# EAGLE board SGWB circuit test board rev1 (EAGLE 9.5.0)
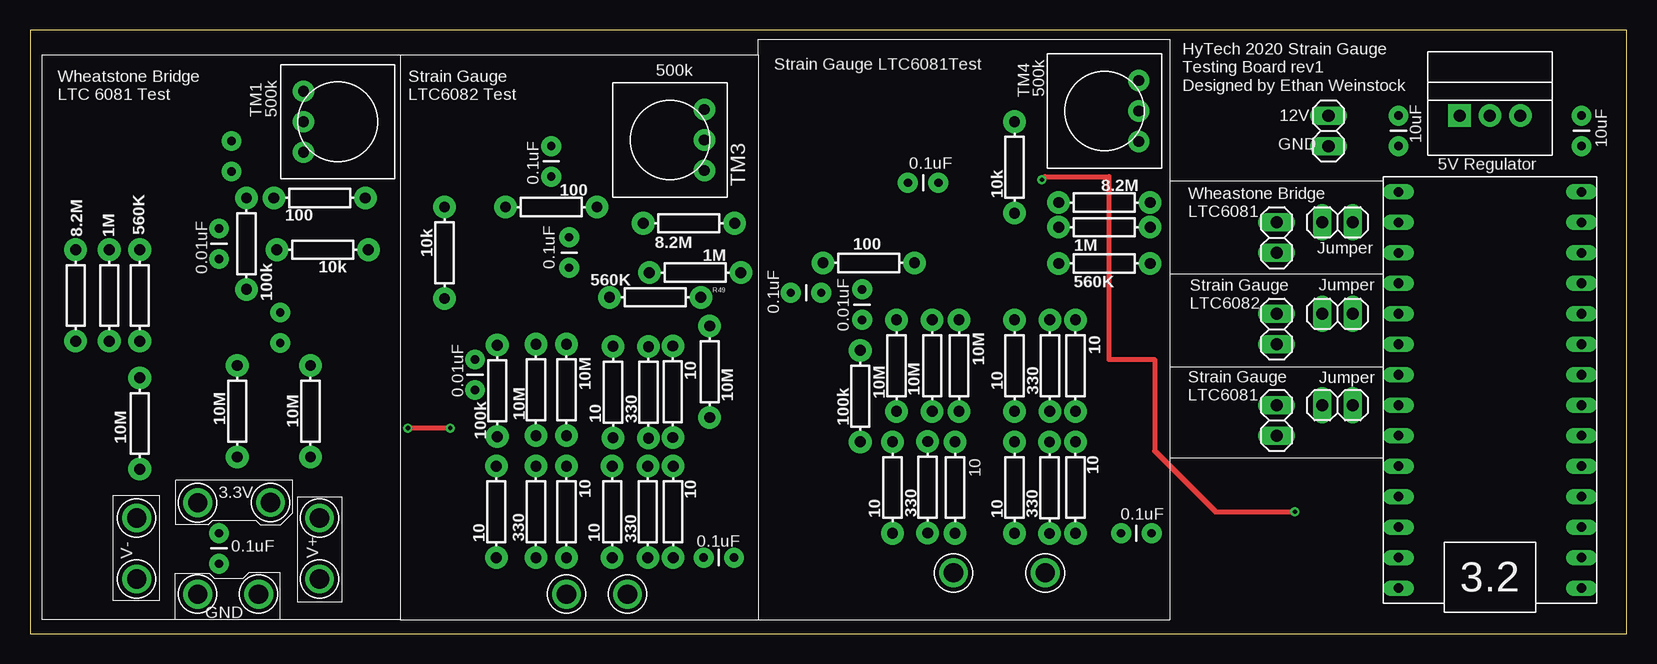
[diagram p0: board, top side]
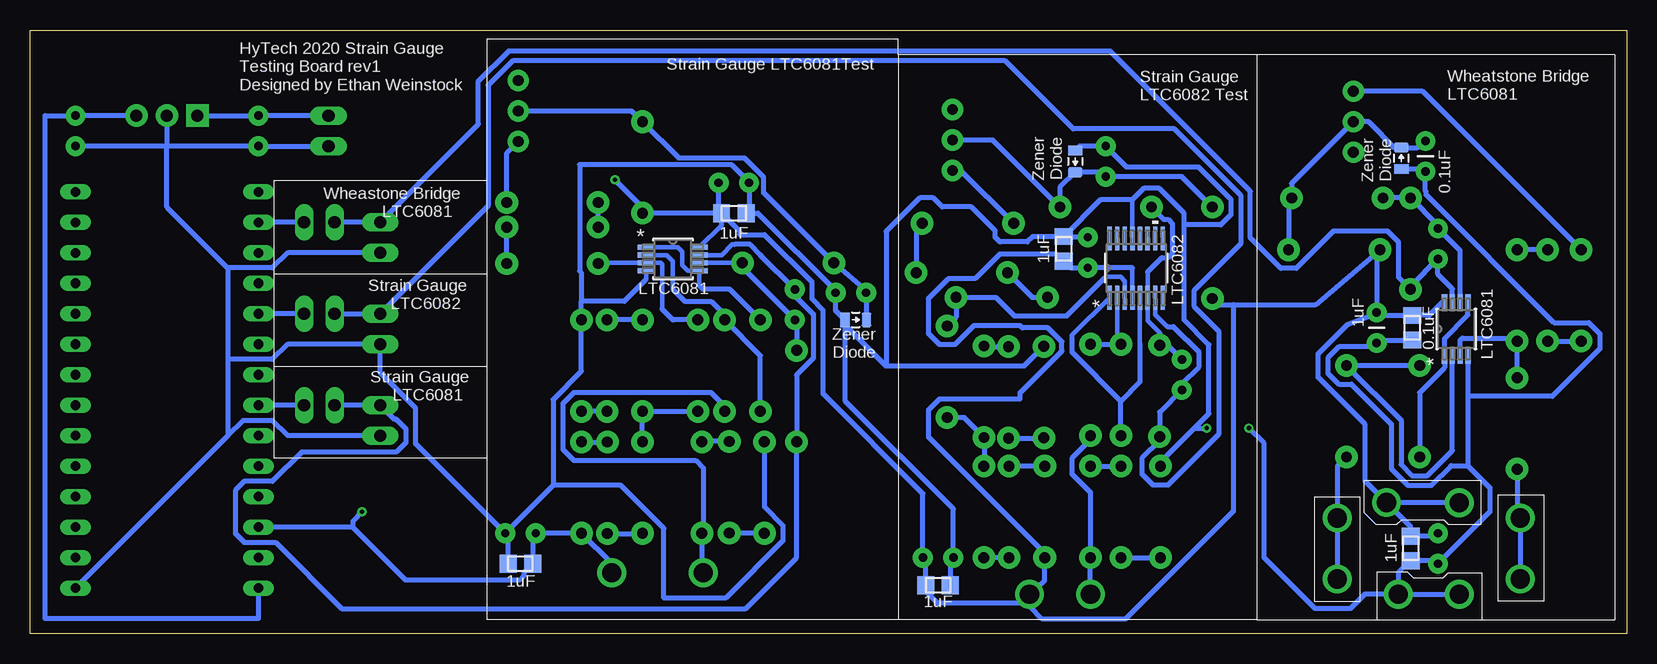
[diagram p1: board, bottom side, seen from below]

Size 133.08 x 50.32 mm. Coordinates in mm from the lower left corner, seen from the top.
Outline: 0,0 133.08,0 133.08,50.32 0,50.32 0,0
Copper layers (1*16): Top 0.035mm / dielectric 1.5mm / Bottom 0.035mm
Design rules "DRC Advanced Circuits": minimum track width 6mil, minimum drill 10mil, track to track 6mil, track to pad 6mil, pad to pad 6mil, via to via 6mil, smd to smd 6mil, copper to edge 40mil, drill to drill 6mil, minimum pad ring 10mil, minimum via ring 8mil, stop-mask expansion 4mil, vias tented up to drill 0mil, thermal gap 10mil

## Footprints (pad centres in the part's own frame; a part is rotated, then mirrored left to right if it is on the bottom)
0805 = smd 1.4 x 1.5: 1 -1.025,0; 2 1.025,0
CAP-PTH-SMALL = drill 0.7 pad 1.651: 1 0,0; 2 2.54,0
1X02 = drill 1.016 long: 1 -1.27,0; 2 1.27,0
0805_D = smd 0.8 x 1.2: A -0.9,0; C 0.9,0
AXIAL-0.3 = drill 0.9 pad 1.88: P$1 -3.81,0; P$2 3.81,0
OKI-78SR = drill 1 pad 1.88 square: 1 -2.54,0 | drill 1 pad 1.88: 2 0,0; 3 2.54,0
TRIM-3386 = drill 0.9 pad 1.778: 1 -2.54,-2.857; 2 0,-2.857; 3 2.54,-2.857
SSOP-16_GN = smd 1.981 x 0.356: 1 -2.464,2.223; 2 -2.464,1.587; 3 -2.464,0.953; 4 -2.464,0.318; 5 -2.464,-0.318; 6 -2.464,-0.953; 7 -2.464,-1.587; 8 -2.464,-2.223; 9 2.464,-2.223; 10 2.464,-1.587; 11 2.464,-0.953; 12 2.464,-0.318; 13 2.464,0.318; 14 2.464,0.953; 15 2.464,1.587; 16 2.464,2.223
MSOP-8_MS = smd 1.397 x 0.432: 1 -2.21,0.975; 2 -2.21,0.325; 3 -2.21,-0.325; 4 -2.21,-0.975; 5 2.21,-0.975; 6 2.21,-0.325; 7 2.21,0.325; 8 2.21,0.975
TEENSY_3.2_SIMPLE = drill 0.8 long: 3.3V 16.51,29.21; A0 16.51,3.81; A1 16.51,6.35; A2 16.51,8.89; A3 16.51,11.43; A4 16.51,13.97; A5 16.51,16.51; A6 16.51,19.05; A7 16.51,21.59; A8 16.51,24.13; A9 16.51,26.67; AGND 16.51,31.75; D0(RX1) 1.27,31.75; D1(TX1) 1.27,29.21; D2 1.27,26.67; D3(CANTX) 1.27,24.13; D4(CANRX) 1.27,21.59; D5 1.27,19.05; D6 1.27,16.51; D7(RX3) 1.27,13.97; D8(TX3) 1.27,11.43; D9(RX2) 1.27,8.89; D10(TX2) 1.27,6.35; D11 1.27,3.81; D12 1.27,1.27; D13 16.51,1.27; GND 1.27,34.29; VIN 16.51,34.29
TEST_POINT = drill 1.6: P$1 0,0

## Placement (x,y rotation side)
C1  0.1uF  [0805]  17.91,25.5 90 bottom
C2  0.01uF  [CAP-PTH-SMALL]  15.75,33.78 270 top
C3  0.1uF  [CAP-PTH-SMALL]  16.79,38.53 90 bottom
C4  1uF  [CAP-PTH-SMALL]  20.85,26.77 270 bottom
C5  10uF  [CAP-PTH-SMALL]  114.05,40.64 90 top
C6  10uF  [CAP-PTH-SMALL]  129.29,40.64 90 top
C11  0.1uF  [CAP-PTH-SMALL]  58.67,6.35 180 top
C12  1uF  [0805]  57.4,4.06 0 bottom
C14  0.01uF  [CAP-PTH-SMALL]  37.08,22.86 270 top
C15  0.1uF  [CAP-PTH-SMALL]  44.93,33.05 270 top
C16  1uF  [0805]  46.94,32.08 90 bottom
C17  0.1uF  [CAP-PTH-SMALL]  43.43,40.64 270 top
C21  0.1uF  [CAP-PTH-SMALL]  15.75,8.38 270 top
C22  1uF  [0805]  18.03,7.11 270 bottom
C26  0.1uF  [CAP-PTH-SMALL]  90.93,8.38 0 top
C27  1uF  [0805]  92.2,5.84 180 bottom
C28  0.1uF  [CAP-PTH-SMALL]  73.15,37.59 0 top
C29  0.01uF  [CAP-PTH-SMALL]  69.34,26.16 90 top
C30  0.1uF  [CAP-PTH-SMALL]  65.94,28.42 180 top
C31  1uF  [0805]  74.42,35.05 0 bottom
J1  JUMPER.1  [1X02]  108.97,34.29 180 top
J2  JUMPER.1  [1X02]  108.97,26.67 180 top
J3  JUMPER.1  [1X02]  108.97,19.05 180 top
JP1  M02  [1X02]  103.89,33.02 90 top
JP2  M02  [1X02]  108.2,41.91 90 top
JP3  M02  [1X02]  103.89,25.4 90 top
JP4  M02  [1X02]  103.89,17.78 90 top
LT1790B  1.25V  [0805_D]  18.8,39.62 90 bottom
LT1790B2  1.25V  [0805_D]  45.97,39.37 270 bottom
LT1790B3  DIODE_ZENER0805  [0805_D]  64.26,26.16 0 bottom
R1  10M  [AXIAL-0.3]  23.37,18.54 90 top
R2  10M  [AXIAL-0.3]  9.14,17.53 90 top
R3  8.2M  [AXIAL-0.3]  3.81,28.19 90 top
R4  10M  [AXIAL-0.3]  17.27,18.54 90 top
R5  100k  [AXIAL-0.3]  18.03,32.51 270 top
R6  100  [AXIAL-0.3]  24.13,36.32 180 top
R7  10k  [AXIAL-0.3]  24.38,32 180 top
R8  10  [AXIAL-0.3]  77.09,12.19 90 top
R15  10  [AXIAL-0.3]  44.7,10.16 90 top
R16  10  [AXIAL-0.3]  53.59,10.16 90 top
R17  10  [AXIAL-0.3]  53.57,20.17 270 top
R18  10M  [AXIAL-0.3]  44.7,20.32 90 top
R19  10M  [AXIAL-0.3]  56.64,21.84 90 top
R20  8.2M  [AXIAL-0.3]  54.91,34.21 180 top
R21  10M  [AXIAL-0.3]  42.16,20.32 90 top
R22  100k  [AXIAL-0.3]  38.94,20.24 270 top
R23  100  [AXIAL-0.3]  43.43,35.56 180 top
R24  10k  [AXIAL-0.3]  34.54,31.75 270 top
R25  10  [AXIAL-0.3]  87.12,12.19 90 top
R26  330  [AXIAL-0.3]  74.8,12.22 270 top
R27  330  [AXIAL-0.3]  84.99,22.35 90 top
R28  10  [AXIAL-0.3]  48.51,10.16 90 top
R29  10M  [AXIAL-0.3]  75.18,22.35 90 top
R31  10  [AXIAL-0.3]  82.04,12.19 90 top
R32  10  [AXIAL-0.3]  82.04,22.35 270 top
R33  10M  [AXIAL-0.3]  77.42,22.35 90 top
R34  8.2M  [AXIAL-0.3]  89.53,35.94 0 top
R35  10M  [AXIAL-0.3]  72.21,22.35 270 top
R36  100k  [AXIAL-0.3]  69.19,19.81 270 top
R37  100  [AXIAL-0.3]  69.9,30.91 0 top
R38  10k  [AXIAL-0.3]  82.04,38.86 270 top
R39  330  [AXIAL-0.3]  51.54,20.12 90 top
R40  10  [AXIAL-0.3]  38.86,10.16 90 top
R41  330  [AXIAL-0.3]  84.96,12.17 270 top
R42  10  [AXIAL-0.3]  87.12,22.35 270 top
R43  10  [AXIAL-0.3]  71.88,12.19 90 top
R44  330  [AXIAL-0.3]  51.49,10.16 270 top
R45  10  [AXIAL-0.3]  48.59,20.14 270 top
R46  330  [AXIAL-0.3]  42.16,10.16 270 top
R47  1M  [AXIAL-0.3]  89.53,33.88 0 top
R48  560K  [AXIAL-0.3]  89.53,30.86 0 top
R49  1M  [AXIAL-0.3]  55.42,30.1 180 top
R50  560K  [AXIAL-0.3]  52.1,28.04 180 top
R53  1M  [AXIAL-0.3]  6.6,28.19 90 top
R54  560K  [AXIAL-0.3]  9.14,28.19 90 top
REG  5V  [OKI-78SR]  121.67,43.18 0 top
TM1  500k  [TRIM-3386]  25.65,42.67 270 top
TM3  500k  [TRIM-3386]  53.34,41.15 90 top
TM4  500k  [TRIM-3386]  89.53,43.56 90 top
U1  LTC6082CGNPBF  [SSOP-16_GN]  40.89,30.48 90 bottom
U$1  LTC6081  [MSOP-8_MS]  14.22,25.4 90 bottom
U$2  TEENSY_3.2_SIMPLE  [TEENSY_3.2_SIMPLE]  130.56,38.1 180 top
U$5  TEST_POINT  [TEST_POINT]  84.61,5.08 0 top
U$6  TEST_POINT  [TEST_POINT]  76.96,5.08 0 top
U$8  TEST_POINT  [TEST_POINT]  49.78,3.3 0 top
U$9  LTC6081  [MSOP-8_MS]  79.5,31.24 0 bottom
U$10  TEST_POINT  [TEST_POINT]  44.7,3.3 0 top
U$11  TEST_POINT  [TEST_POINT]  13.97,10.92 0 top
U$12  TEST_POINT  [TEST_POINT]  24.13,4.57 270 top
U$13  TEST_POINT  [TEST_POINT]  24.13,9.65 270 top
U$14  TEST_POINT  [TEST_POINT]  19.05,3.3 0 top
U$15  TEST_POINT  [TEST_POINT]  13.97,3.3 0 top
U$16  TEST_POINT  [TEST_POINT]  8.89,9.65 90 top
U$17  TEST_POINT  [TEST_POINT]  8.89,4.57 90 top
U$18  TEST_POINT  [TEST_POINT]  20.04,10.95 0 top

## Library data of the parts
C1-C6 C11 C12 C14-C17 C21 C22 C26-C31 J1-J3 JP1-JP4 LT1790B LT1790B2 LT1790B3 R1-R8 R15-R29 R31-R50 R53 R54 REG TM1 TM3 TM4 U$1 U$2 U$5 U$6 U$8-U$18 = HyTechDevices
U1 = HyTechDevices; MANUFACTURER_PART_NUMBER: LTC6082CGN#PBF; VENDOR: Linear Technology

## Nets
3V3: C1.2 C4.1 C11.1 C12.1 C15.2 C16.1 C21.1 C22.1 C26.1 C27.1 C28.2 C31.1 R7.P$2 R24.P$2 R25.P$1 R28.P$1 R38.P$2 U1.4 U$1.8 U$2.3.3V U$5.P$1 U$8.P$1 U$9.8 U$11.P$1 U$18.P$1
+5V: C6.2 REG.3 U$2.VIN
+12V: C5.2 JP2.2 REG.1
GND: C1.1 C3.1 C4.2 C5.1 C6.1 C11.2 C12.2 C15.1 C16.2 C17.1 C21.2 C22.2 C26.2 C27.2 C28.1 C30.1 C31.2 JP1.1 JP2.1 JP3.1 JP4.1 LT1790B2.A LT1790B3.A LT1790B.A R40.P$2 R42.P$1 R43.P$2 R45.P$1 REG.2 U1.13 U$1.4 U$2.GND U$9.4 U$14.P$1 U$15.P$1
INB-: C2.1 R5.P$1 R6.P$2 U$1.6
INB-3: C29.1 R36.P$1 R37.P$2 U$9.6
N$1: R1.P$2 R4.P$2 U$1.2
N$2: R2.P$2 R54.P$1 U$1.3
N$3: C3.2 LT1790B.C R6.P$1 R7.P$1 TM1.2
N$4: J1.1 U$2.A0
N$5: R3.P$2 TM1.1
N$7: J2.1 U$2.A3
N$8: J3.1 U$2.A6
N$13: R16.P$2 R17.P$2 R19.P$1
N$16: C17.2 LT1790B2.C R23.P$1 R24.P$1 TM3.2
N$17: R20.P$2 TM3.1
N$18: R8.P$2 R26.P$1
N$19: R27.P$2 R32.P$1
N$20: R31.P$1 R41.P$2
N$21: R16.P$1 R44.P$2
N$22: R31.P$2 R32.P$2 R33.P$1
N$24: R17.P$1 R39.P$2
N$25: R25.P$2 R41.P$1
N$26: R29.P$2 R35.P$2 U$9.2
N$27: R33.P$2 R48.P$1 U$9.3
N$28: C30.2 LT1790B3.C R37.P$1 R38.P$1 TM4.2
N$29: R34.P$2 TM4.1
N$30: R26.P$2 R43.P$1
N$31: R27.P$1 R42.P$2
N$33: R28.P$2 R44.P$1
N$34: R39.P$1 R45.P$2
N$35: R15.P$2 R46.P$1
N$36: R40.P$1 R46.P$2
N$37: R34.P$1 R47.P$1
N$38: R47.P$2 R48.P$2
N$41: R20.P$1 R49.P$1
N$42: R49.P$2 R50.P$2
N$49: R3.P$1 R53.P$1
N$50: R53.P$2 R54.P$2
OUT1: R4.P$1 U$1.1 U$1.5
OUT3: R35.P$1 U$9.1 U$9.5
OUT4: R21.P$1 U1.1 U1.5
OUT4A+: R19.P$2 R50.P$1 U1.3
OUT4A-: R18.P$2 R21.P$2 U1.2
V+1: R1.P$1 U$12.P$1 U$13.P$1
V-1: R2.P$1 U$16.P$1 U$17.P$1
VOUT1: C2.2 J1.2 JP1.2 R5.P$2 U$1.7
VOUT3: C29.2 J3.2 JP4.2 R36.P$2 U$9.7
VOUT4: C14.2 J2.2 JP3.2 R22.P$2 U1.7
VOUT4-: C14.1 R22.P$1 R23.P$2 U1.6
VR3-2: R8.P$1 R29.P$1 U$6.P$1
VR4-2: R15.P$1 R18.P$1 U$10.P$1

## Tracks (layer width: path | path; a pad name or v marks a point on that pad's centre or on a via)
3V3  (via drill 0.35)
  Top 0.406: v84.33,37.85 84.58,38.1 89.92,38.1 89.92,22.86 93.73,22.86 93.73,15.24 98.81,10.16 v105.41,10.16
  Bottom 0.356: U1.4 41.21,30.47 | U$9.8 75.45,34.06
  Bottom 0.406: U$18.P$1 13.99,10.95 U$11.P$1 | U$5.P$1 84.61,5.87 R25.P$1 C26.1 91.18,8.14 C27.1 91.92,5.1 91.92,4.84 92.27,4.48 101.76,4.48 106.17,8.89 | 106.17,8.89 U$2.3.3V | 75.45,34.06 C31.1 | C31.1 R38.P$2 82.04,35.56 v84.33,37.85 | C31.1 75.69,35.3 C28.2 | 41.21,30.47 41.25,30.5 C15.2 46.39,30.5 C16.1 47.53,31.65 52.26,31.65 54.31,29.59 56.55,29.59 58.19,27.95 58.19,25.01 57.28,24.11 56,24.11 54.43,25.68 50.57,25.68 50.39,25.5 48.25,25.5 47.09,24.34 47.09,23.56 50.57,20.09 50.57,19.58 57.28,19.58 58.19,18.68 58.19,16.38 48.51,6.7 R28.P$1 48.51,4.45 U$8.P$1 | C21.1 15.99,8.14 C22.1 18.03,8.94 U$18.P$1 | C4.1 20.73,26.53 C1.2 16.46,26.53 15.37,27.61 U$1.8 | C4.1 20.94,26.68 23.27,25.79 25.73,23.33 25.73,21.37 21.82,17.46 21.82,12.72 U$18.P$1 | C4.1 20.85,31.73 R7.P$2 25.94,27.43 32.77,27.43 | R24.P$2 34.04,27.43 32.77,27.43 | v105.41,10.16 106.17,9.4 106.17,8.89 | 32.77,27.43 32.77,10.26 41.8,1.22 48.72,1.22 49.78,2.29 U$8.P$1 | C31.1 73.93,33.54 73.93,33.27 71.88,33.27 67.91,29.3 67.91,27.91 66.98,26.98 66.98,19.99 58.67,11.68 C11.1 58.43,6.11 C12.1 58.43,3.54 57.42,2.54 50.42,2.54 U$8.P$1
+5V
  Bottom 0.406: U$2.VIN 114.05,1.27 131.83,1.27 131.83,43.18 C6.2 REG.3
+12V
  Bottom 0.406: REG.1 C5.2 JP2.2
GND  (via drill 0.35)
  Top 0.406: v35.01,17.14 v31.5,17.14
  Bottom 0.356: U1.13 41.21,36.16 | U$9.4 81.71,29.54 81.79,29.46
  Bottom 0.406: JP4.1 111.6,16.51 112.87,17.77 115.32,17.77 116.59,16.51 | 116.59,16.51 U$2.GND | 116.59,22.86 116.58,22.87 112.87,22.87 111.6,24.13 JP3.1 103.89,21.75 100.94,18.8 100.94,15.85 C26.2 | 116.59,22.86 116.59,16.51 | JP1.1 111.6,31.75 112.87,30.49 116.58,30.49 116.59,30.48 | 116.59,30.48 116.59,22.86 | REG.2 121.67,40.64 | 121.67,40.64 121.67,35.56 116.59,30.48 | 121.67,40.64 C5.1 JP2.1 | 121.67,40.64 C6.1 | U$14.P$1 U$15.P$1 | C27.2 93.23,8.14 C26.2 | C26.2 89.48,12.37 | 89.48,12.37 89.48,19.52 87.12,21.88 R42.P$1 87.12,27.71 | 89.48,12.37 83.84,12.37 80.25,8.78 80.25,2.96 75.11,2.96 70.33,7.74 70.33,9.02 71.88,10.57 R43.P$2 | R45.P$1 48.61,23.95 50.26,22.3 61.72,22.3 | LT1790B2.A 45.6,40.64 C17.1 41.71,38.91 35.71,38.91 32.99,36.2 32.99,34.92 33.83,34.08 36.9,34.08 36.91,34.09 | R40.P$2 38.86,14.32 36.06,17.12 | 36.06,17.12 34.84,18.34 34.84,24.09 36.91,26.16 36.91,34.09 | C15.1 46.88,33.05 C16.2 | C16.2 43.88,36.16 41.21,36.16 40.27,37.11 38.98,37.11 36.91,35.03 36.91,34.09 | C12.2 56.38,6.11 C11.2 56.13,10.41 65.16,19.44 65.16,25.74 | 87.12,27.71 87.12,30.07 87.27,30.22 87.27,39.1 74.62,39.1 73.15,37.64 C28.1 73.14,37.58 73.14,35.31 C31.2 72.42,35.05 65.94,28.57 C30.1 65.94,26.94 LT1790B3.A 65.16,25.74 | U$14.P$1 19.05,5.07 C22.2 15.99,6.09 C21.2 11.43,10.16 11.43,12.19 13.25,14.01 | C1.1 20.52,24.48 C4.2 20.85,23.9 24.01,23.9 24.92,22.99 24.92,21.71 24.01,20.8 22.97,20.8 19.63,17.47 19.63,13.75 18.25,12.37 16.29,12.37 14.65,14.01 13.25,14.01 | LT1790B.A 16.82,38.72 C3.1 16.79,36.91 16.74,36.86 16.74,36.58 6.1,25.93 3.17,25.93 2.26,25.03 2.26,23.74 6.22,19.79 13.22,19.79 13.25,19.81
  Bottom 0.406: U$1.4 13.25,19.81 | 13.25,19.81 13.25,14.01 | 61.72,22.3 61.72,33.53 58.93,36.32 57.81,36.32 57.07,35.59 54.63,35.59 52.65,33.6 52.65,33.06 52.26,32.66 49.96,32.66 49.51,33.1 C16.2 | 61.72,22.3 65.16,25.74 | 87.12,27.71 83.54,27.71 81.79,29.46 | U$14.P$1 21.84,3.3 23.04,2.11 25.98,2.11 30.23,6.35 30.23,15.88 v31.5,17.14 | 36.06,17.12 35.04,17.12 v35.01,17.14
INB-
  Bottom 0.406: R6.P$2 R5.P$1 15.75,34.04 C2.1 13.9,31.93 U$1.6
INB-3
  Bottom 0.356: U$9.6 R37.P$2
  Bottom 0.406: R37.P$2 73.72,30.54 C29.1 69.19,26.01 R36.P$1
N$1
  Bottom 0.406: R4.P$2 R1.P$2 18.82,17.8 18.82,14.09 17.91,13.18 16.63,13.18 14.55,15.26 U$1.2
N$2
  Bottom 0.406: R2.P$2 R54.P$1 9.4,24.64 13.72,24.64 13.9,24.45 U$1.3
N$3
  Bottom 0.406: C3.2 17.48,40.52 LT1790B.C 19.38,40.52 21.53,42.67 TM1.2 27.94,37.53 R6.P$1 28.19,36.07 R7.P$1
N$4
  Bottom 0.406: J1.1 U$2.A0
N$5
  Bottom 0.406: R3.P$2 17.02,45.21 TM1.1
N$7
  Bottom 0.406: J2.1 U$2.A3
N$8
  Bottom 0.406: J3.1 U$2.A6
N$13
  Bottom 0.406: R16.P$2 53.57,13.99 R17.P$2 55.24,18.03 R19.P$1
N$16
  Bottom 0.406: R24.P$1 37.08,38.1 C17.2 43.8,38.47 LT1790B2.C 47.24,37.2 R23.P$1 52.83,41.15 TM3.2
N$17
  Bottom 0.406: R20.P$2 55.5,38.61 TM3.1
N$18
  Bottom 0.406: R26.P$1 77.06,16.03 R8.P$2
N$19
  Bottom 0.406: R32.P$1 R27.P$2
N$20
  Bottom 0.406: R41.P$2 82.07,8.36 R31.P$1
N$21
  Bottom 0.406: R44.P$2 R16.P$1
N$22
  Bottom 0.406: R31.P$2 R32.P$2 R33.P$1
N$24
  Bottom 0.406: R17.P$1 53.52,23.93 R39.P$2
N$25
  Bottom 0.406: R25.P$2 87.1,15.98 R41.P$1
N$26
  Bottom 0.356: U$9.2 80.03,31.57 79.5,31.04 79.5,28.7
  Bottom 0.406: 79.5,28.7 78.51,27.71 76.32,27.71 75.18,26.57 R29.P$2 72.21,23.19 R35.P$2
N$27
  Bottom 0.356: 80.4,27.06 80.4,30.8 80.52,30.91 U$9.3 85.67,30.92
  Bottom 0.406: R33.P$2 79.5,26.16 80.4,27.06 | 85.67,30.92 R48.P$1
N$28
  Bottom 0.406: TM4.2 82.93,43.56 R38.P$1 79.03,39.66 73.55,39.66 71.97,38.08 71.97,36.79 R37.P$1 63.32,28.5 C30.2 63.4,26.2 LT1790B3.C
N$29
  Bottom 0.406: R34.P$2 93.34,40.07 TM4.1
N$30
  Bottom 0.406: R26.P$2 71.91,8.41 R43.P$1
N$31
  Bottom 0.406: R27.P$1 R42.P$2
N$33
  Bottom 0.406: R28.P$2 R44.P$1
N$34
  Bottom 0.406: R39.P$1 48.62,16.31 R45.P$2
N$35
  Bottom 0.406: R15.P$2 R46.P$1
N$36
  Bottom 0.406: R46.P$2 R40.P$1
N$37
  Bottom 0.406: R47.P$1 R34.P$1
N$38
  Bottom 0.406: R48.P$2 R47.P$2
N$41
  Bottom 0.406: R20.P$1 59.23,33.71 R49.P$1
N$42
  Bottom 0.406: R49.P$2 49.55,28.04 R50.P$2
N$49
  Bottom 0.406: R53.P$1 R3.P$1
N$50
  Bottom 0.406: R53.P$2 R54.P$2
OUT1
  Bottom 0.406: R4.P$1 17.27,20.1 15.2,22.17 U$1.1 15.2,24.6 13.25,26.55 U$1.5
OUT3
  Bottom 0.356: 77.29,29.03 U$9.5 78.27,30.27 78.72,30.71 78.72,31.83 79.1,32.22 U$9.1
  Bottom 0.406: R35.P$1 74.75,28.7 76.96,28.7 77.29,29.03
OUT4
  Bottom 0.356: U1.1 46.25,24.88 | U1.5 40.58,24.17
  Bottom 0.406: R21.P$1 42.16,19.4 | 42.16,19.4 46.25,23.49 46.25,24.88 | 42.16,19.4 40.58,20.99 40.58,24.17
OUT4A+
  Bottom 0.356: U1.3 41.85,29.4 42.19,29.74 43.42,29.74 43.55,29.62
  Bottom 0.406: R19.P$2 55.9,26.39 R50.P$1 52.59,28.04 51.04,26.49 46.67,26.49 43.55,29.62
OUT4A-
  Bottom 0.356: U1.2 42.48,24.45
  Bottom 0.406: R18.P$2 R21.P$2 42.33,24.3 42.48,24.45
V+1
  Bottom 0.406: U$12.P$1 U$13.P$1 24.13,13.97 R1.P$1
V-1
  Bottom 0.406: U$17.P$1 U$16.P$1 9.14,9.91 R2.P$1
VOUT1
  Bottom 0.406: J1.2 JP1.2 95.71,42.47 95.71,46.05 93.2,48.56 43.06,48.56 31.37,36.88 31.37,32.99 28.84,30.45 27.55,30.45 24.45,33.55 19.93,33.55 19.02,32.65 19.02,29.69 R5.P$2 18.03,28.96 C2.2 15.75,29.95 14.55,28.75 U$1.7
VOUT3
  Bottom 0.356: U$9.7 75.44,31.57 74.55,32.46 74.35,32.46
  Bottom 0.406: J3.2 JP4.2 102.72,17.88 102.56,17.88 101.75,17.08 101.75,15.94 102.56,15.14 110.44,15.14 112.88,12.69 115.22,12.69 115.96,11.95 115.96,8.37 115.22,7.63 112.61,7.63 107.09,2.1 73.43,2.1 69.19,6.34 R36.P$2 69.19,21.58 67.79,22.98 67.79,26.64 69.34,28.19 C29.2 72.16,31.52 72.16,31.55 73.07,32.46 74.35,32.46
VOUT4
  Bottom 0.356: U1.7 39.31,26.61 38.3,25.6
  Bottom 0.406: J2.2 JP3.2 94.89,35.66 94.89,45.72 92.86,47.75 51.82,47.75 46.14,42.08 37.72,42.08 32.18,36.54 32.18,32.49 36.09,28.58 36.09,27.3 34.02,25.23 34.02,16.62 38.22,12.42 39.5,12.42 40.41,13.33 40.41,14.61 38.94,16.09 R22.P$2 38.94,18.47 C14.2 37.08,20.83 35.65,22.27 35.65,23.45 37.8,25.6 38.3,25.6
VOUT4-
  Bottom 0.356: 39.94,30.16 U1.6 39.94,26.67 39.94,26.07 38.94,25.07
  Bottom 0.406: C14.1 38.28,24.05 R22.P$1 38.94,25.07 | R23.P$2 38.61,34.54 38.24,34.54 37.88,34.19 37.88,31.7 38.24,31.34 38.76,31.34 39.94,30.16
VR3-2
  Bottom 0.406: R29.P$1 75.18,18.95 76.32,20.09 87.76,20.09 88.67,19.18 88.67,15.36 87.76,14.45 77.6,14.45 76.96,13.81 76.96,8.51 R8.P$1 77.09,5.21 U$6.P$1
VR4-2
  Bottom 0.406: U$10.P$1 R15.P$1 44.7,11.78 46.25,13.33 46.25,14.61 44.7,16.16 R18.P$1

## Text on the board
tPlace: Strain Gauge LTC6081Test | HyTech 2020 Strain Gauge / Testing Board rev1 / Designed by Ethan Weinstock | Wheatstone Bridge / LTC 6081 Test | Strain Gauge / LTC6082 Test
bPlace: HyTech 2020 Strain Gauge / Testing Board rev1 / Designed by Ethan Weinstock | Wheastone Bridge / LTC6081 | Strain Gauge / LTC6082 | LTC6081 | Strain Gauge / LTC6081
tNames: 12V | GND | 5V Regulator | Wheastone Bridge / LTC6081 | Jumper | Jumper | Strain Gauge / LTC6082 | Jumper | Strain Gauge / LTC6081 | 3.3V | V- | V+ | GND
bNames: Strain Gauge LTC6081Test | Wheatstone Bridge / LTC6081 | Strain Gauge / LTC6082 Test | Zener / Diode | Zener / Diode | LTC6082 | LTC6081 | Zener / Diode